# Allegro board gumstix_expansion_v1_1.brd
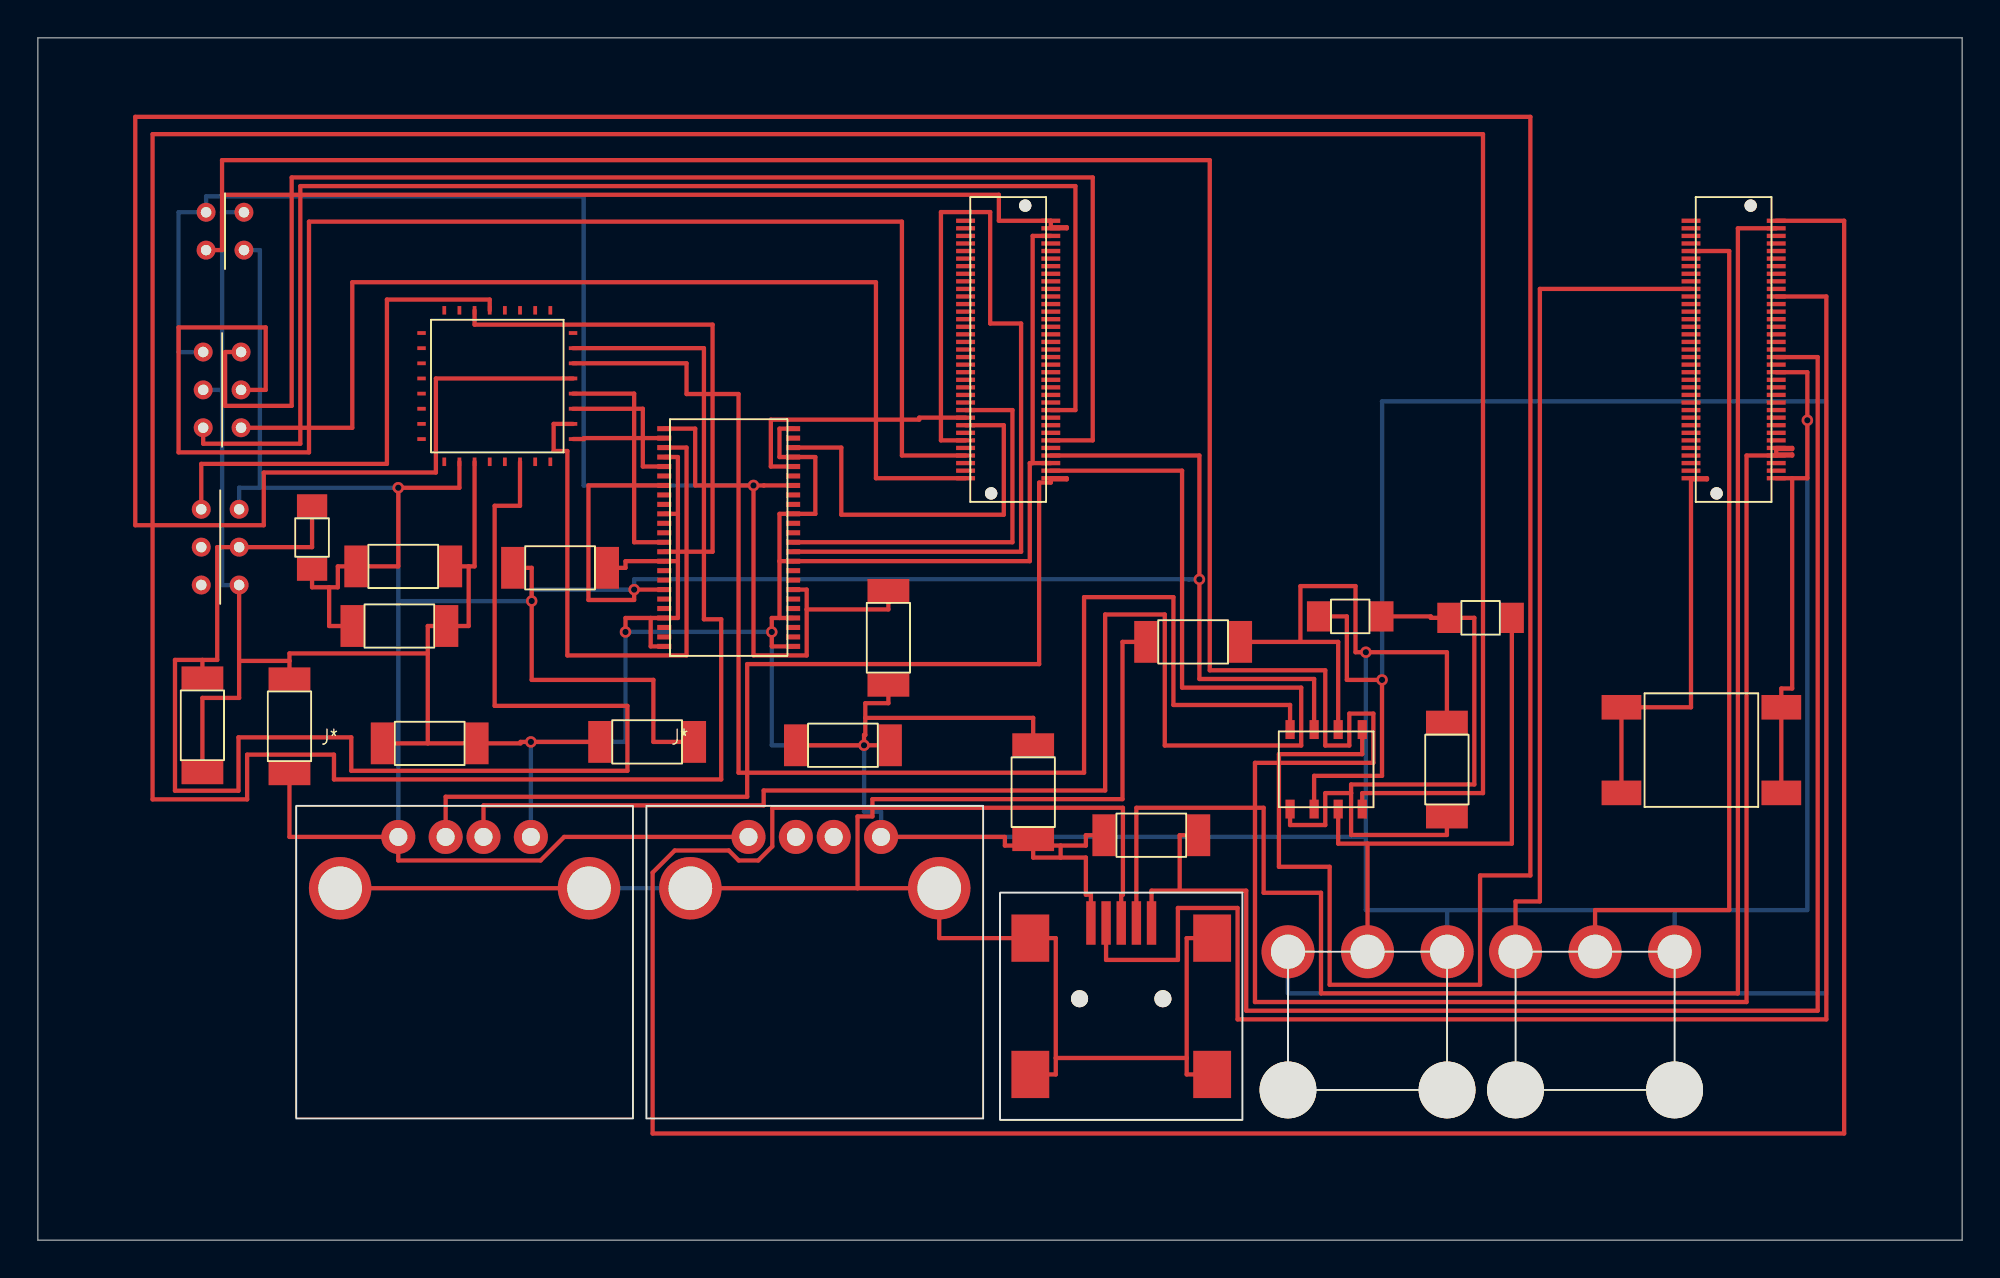
[diagram p0: board, top side]
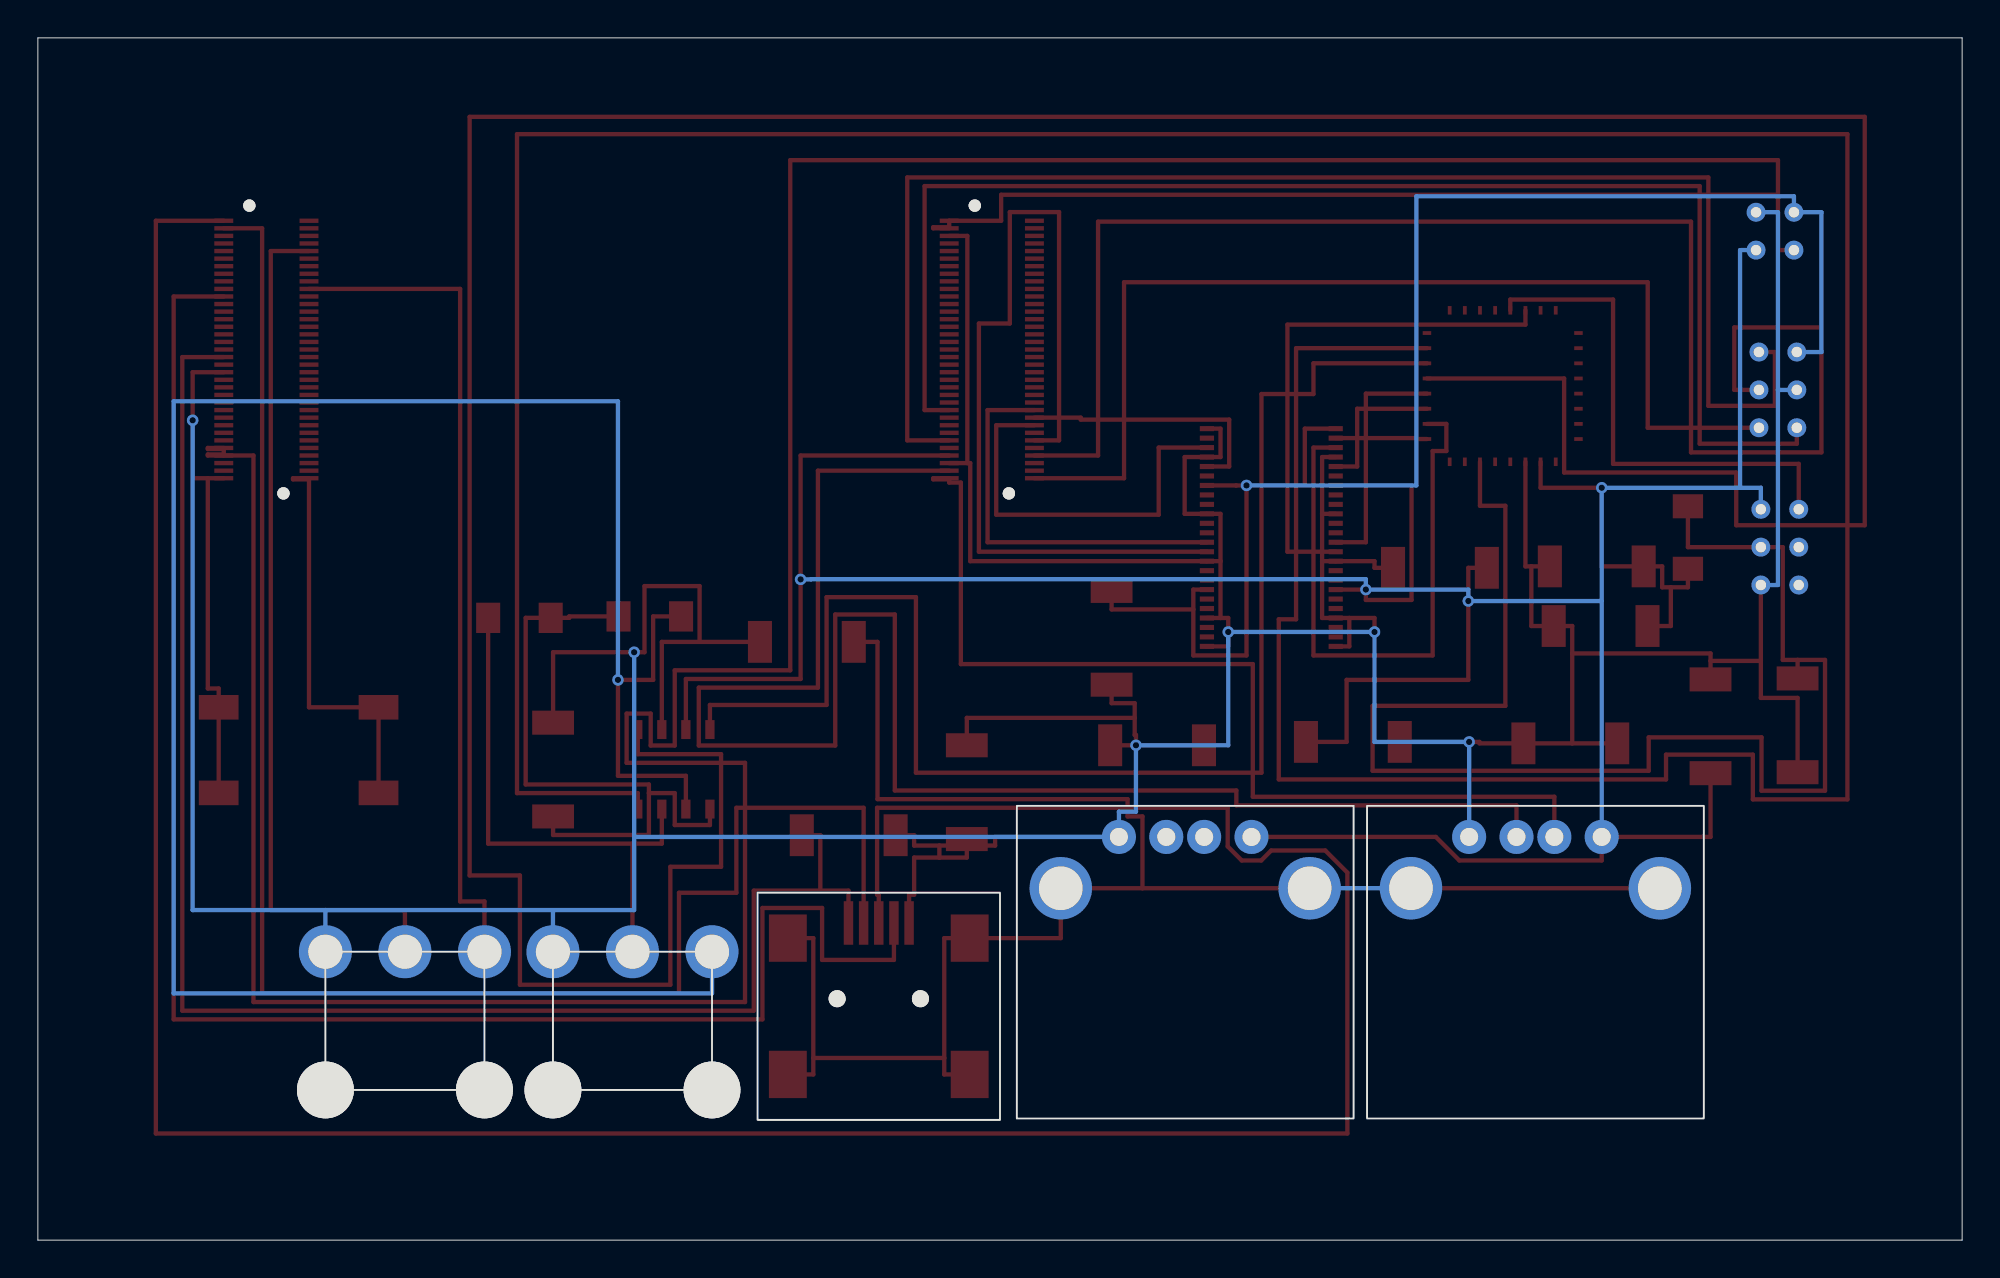
[diagram p1: board, bottom side, seen from below]

Outline 101.6 x 63.5 mm; copper layers: TOP, BOTTOM. Coordinates in mm from the lower left corner of the outline.
Outline path: 0,63.5 101.6,63.5 101.6,0 0,0 0,63.5

## Placement (name value [footprint] x y rotation side)
C1  4.7u  [SMDCAP]  13.28 27.08 270 top
C2  0.01u  [SMDCAP]  20.75 26.24 0 top
C3  4.7u  [SMDCAP]  32.23 26.31 0 top
C4  0.01u  [SMDCAP]  42.44 26.14 180 top
C5  4.7u  [SMDCAP]  58.85 21.39 0 top
C6  0.01u  [SMDCAP]  52.55 23.6 270 top
C7  0.1u  [SMDCAP]  19.23 35.59 180 top
C8  10u  [SMDCAP]  19.15 32.44 0 top
C9  0.1u  [SMDCAP]  27.64 35.51 0 top
C10  0.1u  [SMDCAP]  44.91 31.75 270 top
C11  0.1u  [SMDCAP]  74.4 24.79 270 top
C12  0.1u  [SMDCAP]  8.69 27.25 90 top
C13  1n  [SMDCAP]  61.06 31.6 0 top
J1  GUMSTIX_J1  [GUMSTIX]  89.53 47.04 180 top
J2  GUMSTIX_J4  [GUMSTIX]  51.23 47.04 0 top
J3  4 HEADER  [DIP4_CONN]  9.88 53.29 0 top
J4  CON6  [USBA]  22.53 14.05 0 top
J6  CON6  [USBA]  41.02 14.05 0 top
J7  Background Header  [DIP6_CONN]  9.63 36.6 0 top
J9  CON3  [MOLEX_3]  82.22 11.58 0 top
J10  CON6  [DIP6_CONN]  9.73 44.91 0 top
J11  CON3  [MOLEX_3]  70.21 11.58 0 top
J12  CON9  [MUSBA_TSMT]  57.2 12.75 90 top
R3  60  [SMDRES]  76.17 32.87 0 top
R4  60  [SMDRES]  69.29 32.94 0 top
R5  10k  [SMDRES]  14.48 37.11 270 top
S1  -  [SWITCH]  87.83 25.88 180 top
U1  MC9S08DZ60  [MC9S08_LQFP32]  24.26 45.11 90 top
U2  SN74LVC16T245  [SN74_DGG]  36.47 37.11 0 top
U3  TJA1040T  [TJA1040_SO8]  68.02 24.87 270 top

## Library data of the parts
C1-C6 C8-C10 = C_elect_0: Tolerance: ***; User Part Number: ***
C7 C11 C12 = C: Tolerance: ***; User Part Number: ***
C13 = C_elect_1: Tolerance: ***; User Part Number: ***
J1 = GUMSTIX_J1
J2 = GUMSTIX_J4
J3 = 4 HEADER
J4 J6 J10 = CON6
J7 = CONN MOD 6-6_J
J9 J11 = CON3
J12 = CON9
R3-R5 = R: Tolerance: ***; User Part Number: ***
S1 = SWITCH
U1 = MC9S08DZ60
U2 = SN74LVC16T245
U3 = TJA1040T

## Footprints (pads in the part's own frame, mm; a bottom-side part is the same pattern mirrored in y, then rotated)
DIP4_CONN
  round 1 hole 0.55: 1(-1,1) 2(-1,-1) 3(1,-1) 4(1,1)
DIP6_CONN
  round 1 hole 0.55: 1(-1,2) 2(-1,0) 3(-1,-2) 4(1,-2) 5(1,0) 6(1,2)
GUMSTIX
  round 0.65 hole 0.65 unplated: (-0.9,-7.6) (0.9,7.6)
  rect 1x0.23 smd: 1(2.25,6.8) 2(2.25,6.4) 3(2.25,6) 4(2.25,5.6) 5(2.25,5.2) 6(2.25,4.8) 7(2.25,4.4) 8(2.25,4) 9(2.25,3.6) 10(2.25,3.2) 11(2.25,2.8) 12(2.25,2.4) 13(2.25,2) 14(2.25,1.6) 15(2.25,1.2) 16(2.25,0.8) 17(2.25,0.4) 18(2.25,0) 19(2.25,-0.4) 20(2.25,-0.8) 21(2.25,-1.2) 22(2.25,-1.6) 23(2.25,-2) 24(2.25,-2.4) 25(2.25,-2.8) 26(2.25,-3.2) 27(2.25,-3.6) 28(2.25,-4) 29(2.25,-4.4) 30(2.25,-4.8) 31(2.25,-5.2) 32(2.25,-5.6) 33(2.25,-6) 34(2.25,-6.4) 35(2.25,-6.8) 36(-2.25,-6.8) 37(-2.25,-6.4) 38(-2.25,-6) 39(-2.25,-5.6) 40(-2.25,-5.2) 41(-2.25,-4.8) 42(-2.25,-4.4) 43(-2.25,-4) 44(-2.25,-3.6) 45(-2.25,-3.2) 46(-2.25,-2.8) 47(-2.25,-2.4) 48(-2.25,-2) 49(-2.25,-1.6) 50(-2.25,-1.2) 51(-2.25,-0.8) 52(-2.25,-0.4) 53(-2.25,0) 54(-2.25,0.4) 55(-2.25,0.8) 56(-2.25,1.2) 57(-2.25,1.6) 58(-2.25,2) 59(-2.25,2.4) 60(-2.25,2.8) 61(-2.25,3.2) 62(-2.25,3.6) 63(-2.25,4) 64(-2.25,4.4) 65(-2.25,4.8) 66(-2.25,5.2) 67(-2.25,5.6) 68(-2.25,6) 69(-2.25,6.4) 70(-2.25,6.8)
MC9S08_LQFP32
  rect 0.45x0.2 smd: 1(-4,2.8) 2(-4,2) 3(-4,1.2) 4(-4,0.4) 5(-4,-0.4) 6(-4,-1.2) 7(-4,-2) 8(-4,-2.8) 17(4,-2.8) 18(4,-2) 19(4,-1.2) 20(4,-0.4) 21(4,0.4) 22(4,1.2) 23(4,2) 24(4,2.8)
  rect 0.2x0.45 smd: 9(-2.8,-4) 10(-2,-4) 11(-1.2,-4) 12(-0.4,-4) 13(0.4,-4) 14(1.2,-4) 15(2,-4) 16(2.8,-4) 25(2.8,4) 26(2,4) 27(1.2,4) 28(0.4,4) 29(-0.4,4) 30(-1.2,4) 31(-2,4) 32(-2.8,4)
MOLEX_3
  round 3 hole 3 unplated: (-4.2,-3.65) (4.2,-3.65)
  round 2.8 hole 1.8: 1(-4.2,3.65) 2(0,3.65) 3(4.2,3.65)
MUSBA_TSMT
  round 0.9 hole 0.9 unplated: (0,2.2) (0,-2.2)
  rect 2.3x0.5 smd: 1(4,-1.6) 2(4,-0.8) 3(4,0) 4(4,0.8) 5(4,1.6)
  rect 2.5x2 smd: 6(-4,4.8) 7(-4,-4.8) 8(3.2,-4.8) 9(3.2,4.8)
SMDCAP
  rect 1.27x2.21 smd: 1(-2.54,0) 2(2.413,0)
SMDRES
  rect 1.27x1.6 smd: 1(-1.651,0) 2(1.651,0)
SN74_DGG
  rect 0.75x0.27 smd: 1(-3.4,5.75) 2(-3.4,5.25) 3(-3.4,4.75) 4(-3.4,4.25) 5(-3.4,3.75) 6(-3.4,3.25) 7(-3.4,2.75) 8(-3.4,2.25) 9(-3.4,1.75) 10(-3.4,1.25) 11(-3.4,0.75) 12(-3.4,0.25) 13(-3.4,-0.25) 14(-3.4,-0.75) 15(-3.4,-1.25) 16(-3.4,-1.75) 17(-3.4,-2.25) 18(-3.4,-2.75) 19(-3.4,-3.25) 20(-3.4,-3.75) 21(-3.4,-4.25) 22(-3.4,-4.75) 23(-3.4,-5.25) 24(-3.4,-5.75) 25(3.4,-5.75) 26(3.4,-5.25) 27(3.4,-4.75) 28(3.4,-4.25) 29(3.4,-3.75) 30(3.4,-3.25) 31(3.4,-2.75) 32(3.4,-2.25) 33(3.4,-1.75) 34(3.4,-1.25) 35(3.4,-0.75) 36(3.4,-0.25) 37(3.4,0.25) 38(3.4,0.75) 39(3.4,1.25) 40(3.4,1.75) 41(3.4,2.25) 42(3.4,2.75) 43(3.4,3.25) 44(3.4,3.75) 45(3.4,4.25) 46(3.4,4.75) 47(3.4,5.25) 48(3.4,5.75)
SWITCH
  rect 2.1x1.3 smd: 1(-4.22,2.26) 2(-4.22,-2.26) 3(4.22,-2.26) 4(4.22,2.26)
TJA1040_SO8
  rect 1x0.49 smd: 1(-2.1,1.905) 2(-2.1,0.635) 3(-2.1,-0.635) 4(-2.1,-1.905) 5(2.1,-1.905) 6(2.1,-0.635) 7(2.1,0.635) 8(2.1,1.905)
USBA
  round 3.3 hole 2.3 unplated: (-6.57,4.54) (6.57,4.54)
  round 1.8 hole 0.95: 1(-3.5,7.25) 2(-1,7.25) 3(1,7.25) 4(3.5,7.25)

## Nets
GND: C1.1(+) C2.1(+) C2.2(-) C3.1(+) C4.1(+) C4.2(-) C5.1(+) C6.1(+) C6.2(-) C7.1 C8.2(-) C9.2(-) C10.2(-) C11.1 C12.1 C13.2(-) J1.56(GND#56) J1.70(GND#70) J2.3(GND#3) J2.33(GND#33) J3.4 J4.4 J6.4 J7.4(2) J9.3 J10.2 J11.3 J12.5 S1.1 S1.2 U1.3(VSS) U2.4(GND#4) U2.10(GND#10) U2.15(GND#15) U2.21(GND#21) U2.24(2DIR) U2.25(2OEN) U2.28(GND#28) U2.34(GND#34) U2.39(GND#39) U2.45(GND#45) U2.48(1OEN) U3.2(GND)
VCC_1.8: C10.1(+) J3.1 J10.1 U2.1(1DIR) U2.31(VCCA#31) U2.42(VCCA#42)
VCC_3.3: J1.66(VSYSTEM#66) J1.67(VSYSTEM#67) J2.1(VSYSTEM#1) J2.2(VSYSTEM#2) J3.2
BKGD: J7.1 U1.21(BKGD/MS)
CANH: J11.2 R3.2 U3.7(CANH)
CANL: J11.1 R4.1 U3.6(CANL)
COMMON_SHIELD: C13.1(+) J12.6 J12.7 J12.8 J12.9
GPIO18: J2.26(GPIO18_MMC3_D0) J10.3
GPIO19: J2.36(GPIO19_MMC3_D1) J10.4
GPIO20: J2.39(GPIO20_MMC3_D2) J10.5
GPIO21: J2.30(GPIO21_MMC3_DAT7) J10.6
GPIO165_IR_RXD3: J1.31(GPIO165_IR_RXD3) J9.2
GPIO166_IR_TXD3: J1.26(GPIO166_IR_TXD3) J9.1
RESET: C12.2 J7.5(4) R5.1 U1.6(RESETN)
RXCAN: U1.14(PTE7/RXD2/RXCAN) U3.4(RXD)
SPI_CLOCK_1.8V: J2.43(GPIO171_SPI1_CLK) U2.46(1A2)
SPI_CLOCK_5V: U1.10(PTE3/SPSCK) U2.3(1B2)
SPI_CS_1.8V: J2.42(GPIO175_SPI1_CS1) U2.47(1A1)
SPI_CS_5V: U1.9(PTE2/SSN) U2.2(1B1)
SPI_INTERRUPT_1.8V: J2.41(GPIO114_SPI1_NIRQ) U2.35(2A2)
SPI_INTERRUPT_5V: U1.22(PTB0/PIB0/ADP8) U2.14(2B2)
SPI_MISO_1.8V: J2.45(GPIO173_SPI1_MISO) U2.36(2A1)
SPI_MISO_5V: U1.12(PTE5/SDA/MISO) U2.13(2B1)
SPI_MOSI_1.8V: J2.44(GPIO172_SPI1_MOSI) U2.44(1A3)
SPI_MOSI_5V: U1.11(PTE4/SCL/MOSI) U2.5(1B3)
STB: U1.15(PTD0/PID0/TPM2CH0) U3.8(STB)
TXCAN: U1.13(PTE6/TXD2/TXCAN) U3.1(TXD)
USB_OTG_DM: J1.37(USBOTG_DM) J12.2
USB_OTG_DP: J1.36(USBOTG_DP) J12.3
USB_OTG_ID: J1.46(USBOTG_ID) J12.4
USB_OTG_VBUS: C5.2(-) J1.54(USBOTG_VBUS) J12.1
USBH_DM: J2.35(USBH_DM) J4.2
USBH_DP: J2.34(USBH_DP) J4.3
USBH_VBUS: C1.2(-) C3.2(-) C7.2 C8.1(+) C9.1(+) J2.32(USBH_VBUS) J3.3 J4.1 J6.1 J7.6 R5.2 U1.2(VDD) U2.7(VCCB#7) U2.18(VCCB#18) U3.3(VCC)
N03550: J1.1(NRESPWRON) S1.3 S1.4
N10323: C11.2 R3.1 R4.2 U3.5(SPLIT)

Pads without a net: J1 2 3 4 5 6 7 8 9 10 11 12 13 14 15 16 17 18 19 20 21 22 23 24 25 27 28 29 30 32 33 34 35 38 39 40 41 42 43 44 45 47 48 49 50 51 52 53 55 57 58 59 60 61 62 63 64 65 68 69; J2 4 5 6 7 8 9 10 11 12 13 14 15 16 17 18 19 20 21 22 23 24 25 27 28 29 31 37 38 40 46 47 48 49 50 51 52 53 54 55 56 57 58 59 60 61 62 63 64 65 66 67 68 69 70; J6 2 3; J7 2 3; U1 1 4 5 7 8 16 17 18 19 20 23 24 25 26 27 28 29 30 31 32; U2 6 8 9 11 12 16 17 19 20 22 23 26 27 29 30 32 33 37 38 40 41 43

## Via types
v1: diameter 0.61, hole 0.33, TOP to BOTTOM, 12 vias

## Routing (per net, layer and track width the routed paths; a pad name or vN(x,y) marks a point on that pad's centre or on a via; arc(x,y) is an arc through that point)
GND: length 373.6
  TOP w0.229: v1(31.03,32.12) 31.03,32.86 32.36,32.86 ; U2.24 32.36,31.36 32.36,32.86 ; U3.2 68.66,31.6 66.66,31.6 ; 20.59,30.99 20.59,26.24 ; 20.59,30.99 13.28,30.99 13.28,30.59 ; 20.59,30.99 20.59,32.44 C8.2 22.75,32.44 22.75,35.59 ; 20.59,26.24 C2.2 25.48,26.24 25.48,26.31 v1(26.03,26.31) C3.1 ; 20.59,26.24 C2.1 ; 39.16,35.86 39.16,38.36 U2.39 41.05,38.36 41.05,41.36 U2.45 39.16,41.36 39.16,42.86 U2.48 ; 39.16,35.86 39.16,32.86 ; 39.16,35.86 U2.34 52.37,35.86 52.37,41.04 52.52,41.04 ; U2.4 33.79,41.36 33.79,38.36 ; U2.25 38.75,31.36 v1(38.75,32.12) 38.75,32.86 39.16,32.86 ; C12.1 8.69,28.64 10.63,28.64 10.63,30.59 ; C11.1 74.4,31.05 v1(70.12,31.05) 69.57,31.05 69.57,34.54 66.66,34.54 66.66,31.6 ; C6.1 52.55,27.58 43.69,27.58 ; 33.79,35.86 U2.15 31.03,35.86 31.03,35.51 C9.2 ; 33.79,35.86 33.79,32.86 U2.21 32.36,32.86 ; 33.79,35.86 33.79,38.36 ; 52.52,41.04 52.52,53.04 J2.3 ; 52.52,41.04 J2.33 ; 92.63,40.24 92.63,29.14 92.05,29.14 S1.2 S1.1 ; 92.63,40.24 J1.70 ; 92.63,40.24 93.43,40.24 v1(93.43,43.3) 93.43,45.84 J1.56 ; C6.2 52.55,20.21 54,20.21 ; C4.2 v1(43.62,26.14) ; v1(43.62,26.14) 43.62,26.68 43.69,26.68 43.69,27.58 ; v1(43.62,26.14) C4.1 ; 66.66,31.6 C13.2 ; 13.28,30.59 10.63,30.59 ; 13.28,30.59 C1.1 ; J6.4 51.06,21.3 51.06,20.84 54,20.84 ; U2.28 39.16,32.86 ; 22.75,35.59 23.06,35.59 U1.3 ; 22.75,35.59 C7.1 ; 10.63,30.59 J7.4 ; 54,20.21 55.33,20.21 55.33,18.24 55.6,18.24 J12.5 ; 54,20.21 54,20.84 ; 43.69,27.58 43.69,28.36 44.91,28.36 C10.2 ; 54,20.84 55.33,20.84 55.33,21.39 C5.1 ; U2.10 33.79,38.36
  BOTTOM w0.229: 70.12,21.3 70.12,17.43 74.41,17.43 ; 70.12,21.3 J6.4 44.52,22.63 43.62,22.63 v1(43.62,26.14) 38.75,26.14 v1(38.75,32.12) v1(31.03,32.12) 31.03,26.31 v1(26.03,26.31) J4.4 ; 70.12,21.3 v1(70.12,31.05) ; J9.3 86.42,17.43 ; 86.42,17.43 74.41,17.43 ; 86.42,17.43 93.43,17.43 v1(93.43,43.3) ; J11.3 74.41,17.43 ; J3.4 9.72,54.29 9.72,44.91 ; J10.2 9.72,44.91 ; 9.72,44.91 9.72,34.6 J7.4
VCC_1.8: length 86.2
  TOP w0.229: 40.59,33.31 44.91,33.31 C10.1 ; 40.59,33.31 40.59,34.36 U2.31 ; 40.59,33.31 40.59,30.88 37.78,30.88 v1(37.78,39.86) ; v1(37.78,39.86) 34.71,39.86 34.71,42.86 U2.1 ; v1(37.78,39.86) 38.33,39.86 U2.42
  BOTTOM w0.229: v1(37.78,39.86) 28.82,39.86 28.82,55.13 8.88,55.13 J3.1 7.43,54.29 7.43,46.91 J10.1
VCC_3.3: length 227.9
  TOP w0.229: J3.2 9.72,52.29 9.72,55.21 ; 9.72,55.21 9.72,57.04 61.87,57.04 61.87,30.1 67.97,30.1 67.97,26.12 69.24,26.12 69.24,27.81 70.51,27.81 70.51,25.21 64.26,25.21 64.26,12.58 90.22,12.58 90.22,41.44 J1.67 92.63,41.44 92.63,41.5 91.78,41.5 91.78,41.78 92.63,41.78 92.63,41.84 J1.66 ; 9.72,55.21 50.74,55.21 50.74,53.84 J2.1 53.48,53.5 54.32,53.5 54.32,53.44 J2.2
BKGD: length 26.9
  TOP w0.229: J7.1 8.63,41 18.43,41 18.43,49.68 23.86,49.68 U1.21
CANH: length 28.6
  TOP w0.229: 70.21,20.94 77.83,20.94 R3.2 ; 70.21,20.94 68.66,20.94 U3.7 ; 70.21,20.94 J11.2
CANL: length 117.2
  TOP w0.229: R4.1 69.11,32.94 69.11,29.59 v1(70.97,29.59) 70.97,24.52 67.39,24.52 U3.6
  BOTTOM w0.229: v1(70.97,29.59) 70.97,44.3 94.43,44.3 94.43,13.03 66.01,13.03 J11.1
COMMON_SHIELD: length 94
  TOP w0.229: J12.6 53.74,8.75 53.74,9.62 ; 60.66,9.62 60.66,8.75 J12.7 ; 60.66,9.62 60.66,15.95 J12.8 ; 60.66,9.62 53.74,9.62 ; 53.74,9.62 53.74,15.95 J12.9 47.59,15.95 47.59,18.59 43.28,18.59 ; 15.96,18.59 29.1,18.59 ; 43.28,18.59 43.28,22.38 44.06,22.38 44.06,23.29 57.27,23.29 57.27,31.6 C13.1 ; 43.28,18.59 34.45,18.59
  BOTTOM w0.229: 34.45,18.59 29.1,18.59
GPIO18: length 73.6
  TOP w0.229: J2.26 54.78,43.84 54.78,55.67 13.86,55.67 13.86,42.06 8.73,42.06 J10.3
GPIO19: length 56.3
  TOP w0.229: J2.36 44.25,40.24 44.25,50.59 16.6,50.59 16.6,42.91 J10.4
GPIO20: length 81.9
  TOP w0.229: J10.5 12.03,44.91 12.03,48.21 7.43,48.21 7.43,41.61 14.31,41.61 14.31,53.79 45.62,53.79 45.62,41.44 J2.39
GPIO21: length 77.7
  TOP w0.229: J10.6 9.89,46.91 9.89,44.06 13.4,44.06 13.4,56.13 55.7,56.13 55.7,42.24 J2.30
GPIO165_IR_RXD3: length 46.1
  TOP w0.229: J9.2 82.22,17.43 89.3,17.43 89.3,52.24 J1.31
GPIO166_IR_TXD3: length 44.3
  TOP w0.229: J9.1 78.02,17.89 79.31,17.89 79.31,50.24 J1.26
RESET: length 76.4
  TOP w0.229: 8.69,30.65 7.24,30.65 7.24,23.74 10.59,23.74 10.59,26.56 16.55,26.56 16.55,24.79 31.13,24.79 31.13,28.22 24.12,28.22 24.12,38.79 25.46,38.79 U1.6 ; 8.69,30.65 C12.2 ; 8.69,30.65 9.47,30.65 9.47,36.6 J7.5 14.48,36.6 R5.1
RXCAN: length 75.7
  TOP w0.229: U3.4 66.12,28.27 59.96,28.27 59.96,33.96 55.24,33.96 55.24,24.69 37,24.69 37,44.69 34.25,44.69 34.25,46.31 U1.14
SPI_CLOCK_1.8V: length 21.4
  TOP w0.229: U2.46 42.42,41.86 42.42,38.32 51,38.32 51,43.04 J2.43
SPI_CLOCK_5V: length 32.4
  TOP w0.229: U2.3 34.25,41.86 34.25,30.88 27.96,30.88 27.96,41.68 27.23,41.68 27.23,43.11 U1.10
SPI_CS_5V: length 4.9
  TOP w0.229: U1.9 28.82,42.31 28.82,42.36 U2.2
SPI_INTERRUPT_1.8V: length 47.6
  TOP w0.229: U2.35 51.91,36.36 51.91,48.41 50.28,48.41 50.28,54.3 47.68,54.3 47.68,42.24 J2.41
SPI_INTERRUPT_5V: length 27.9
  TOP w0.229: U1.22 23.06,48.35 35.62,48.35 35.62,36.36 U2.14
SPI_MISO_1.8V: length 21
  TOP w0.229: U2.36 51.46,36.86 51.46,43.84 J2.45
SPI_MISO_5V: length 12.7
  TOP w0.229: U1.12 31.48,44.71 31.48,36.86 U2.13
SPI_MOSI_1.8V: length 14
  TOP w0.229: U2.44 38.7,40.86 38.7,43.34 46.54,43.34 46.54,43.44 J2.44
SPI_MOSI_5V: length 7.9
  TOP w0.229: U1.11 31.94,43.91 31.94,40.86 U2.5
STB: length 211.7
  TOP w0.229: U3.8 69.93,23.61 76.3,23.61 76.3,58.41 6.06,58.41 6.06,23.28 11.05,23.28 11.05,25.64 15.63,25.64 15.63,24.33 36.08,24.33 36.08,32.79 35.17,32.79 35.17,47.11 U1.15
TXCAN: length 203.1
  TOP w0.229: U3.1 69.93,25.67 65.53,25.67 65.53,19.72 68.21,19.72 68.21,13.49 76.15,13.49 76.15,19.26 78.8,19.26 78.8,59.33 5.14,59.33 5.14,37.76 11.93,37.76 11.93,40.54 21.01,40.54 21.01,45.51 U1.13
USB_OTG_DM: length 90.1
  TOP w0.229: J1.37 89.76,53.44 89.76,13.03 67.75,13.03 67.75,18.35 64.72,18.35 64.72,22.83 58,22.83 J12.2
USB_OTG_DP: length 162.5
  TOP w0.229: J12.3 57.2,18.24 57.29,18.24 57.29,22.83 38.78,22.83 38.78,20.8 38.04,20.05 37.01,20.05 36.48,20.58 33.63,20.58 32.46,19.41 32.46,5.63 95.37,5.63 95.37,53.84 J1.36
USB_OTG_ID: length 89.4
  TOP w0.229: J12.4 56.4,14.8 60.19,14.8 60.19,17.54 63.34,17.54 63.34,11.66 94.43,11.66 94.43,49.84 J1.46
USB_OTG_VBUS: length 83.8
  TOP w0.229: C5.2 60.29,21.39 60.29,18.46 ; J1.54 93.97,46.64 93.97,12.12 63.8,12.12 63.8,18.46 60.29,18.46 ; J12.1 58.8,18.46 60.29,18.46
USBH_DM: length 52.6
  TOP w0.229: J2.35 54.32,40.24 54.32,40.18 53.48,40.18 53.48,40.01 52.87,40.01 52.87,30.42 37.45,30.42 37.45,23.42 21.53,23.42 J4.2
USBH_DP: length 89.6
  TOP w0.229: J2.34 60.41,40.64 60.41,29.18 66.7,29.18 66.7,26.12 59.5,26.12 59.5,33.05 56.35,33.05 56.35,23.75 38.32,23.75 38.32,22.96 23.53,22.96 J4.3
USBH_VBUS: length 194.6
  TOP w0.229: 15.38,34.48 14.48,34.48 R5.2 ; 15.38,34.48 15.38,32.44 C8.1 ; 15.38,34.48 15.84,34.48 15.84,35.59 C7.2 19.03,35.59 v1(19.03,39.74) 22.26,39.74 U1.2 ; U3.3 67.39,29.64 61.33,29.64 v1(61.33,34.9) 61.33,41.44 J2.32 ; U2.7 29.07,39.86 29.07,33.81 31.48,33.81 v1(31.48,34.36) U2.18 ; J6.1 27.79,21.3 26.54,20.05 19.03,20.05 J4.1 13.28,21.3 C1.2 ; C3.2 32.5,26.31 32.5,29.59 26.07,29.59 v1(26.07,33.76) 26.07,35.51 C9.1
  BOTTOM w0.229: J3.3 11.72,52.29 11.72,39.74 ; J4.1 19.03,33.76 ; 19.03,33.76 v1(26.07,33.76) 26.07,34.36 v1(31.48,34.36) 31.48,34.91 60.78,34.91 60.78,34.9 v1(61.33,34.9) ; 19.03,33.76 v1(19.03,39.74) 11.72,39.74 ; 11.72,39.74 10.63,39.74 J7.6
N03550: length 22
  TOP w0.229: S1.4 S1.3 87.29,28.14 87.29,40.18 88.13,40.18 88.13,40.24 J1.1
N10323: length 34.7
  TOP w0.229: U3.5 66.12,21.92 67.97,21.92 67.97,23.61 69.34,23.61 ; 69.34,23.61 69.34,24.07 75.84,24.07 75.84,32.87 R3.1 73.55,32.87 73.55,32.94 R4.2 ; 69.34,23.61 69.34,21.4 74.4,21.4 C11.2
